# Altium PCB 2016.PcbDoc (part 1 of 6)
Units mm, origin at the board's own origin, x right, y up, seen from the top; angles counter-clockwise.
Board outline 169.8 x 134.24 mm, 2 copper layers (Top Layer, Bottom Layer); 131 components, 191 nets, 797 pads, 168 vias.
Unrouted connection lines stored in the file: 2.
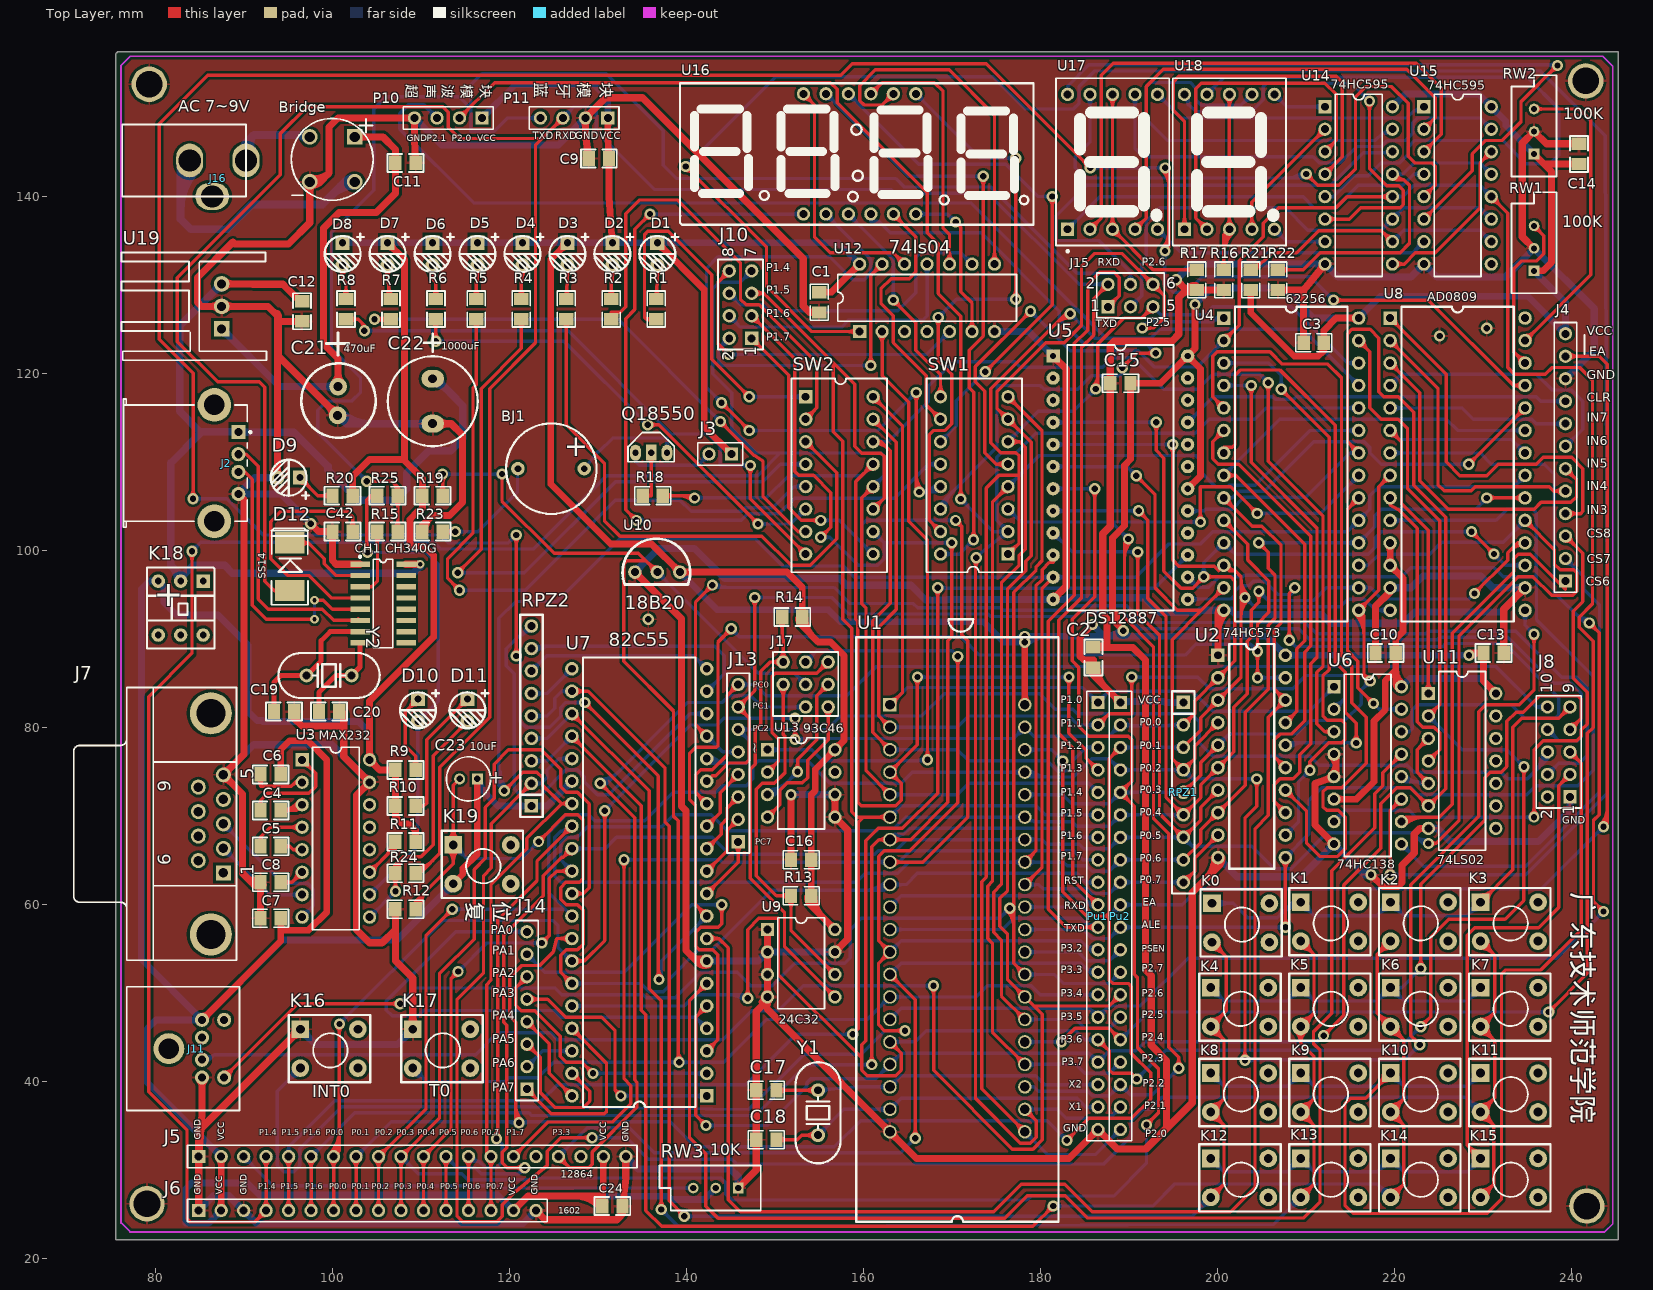
[diagram p0: Top Layer view]
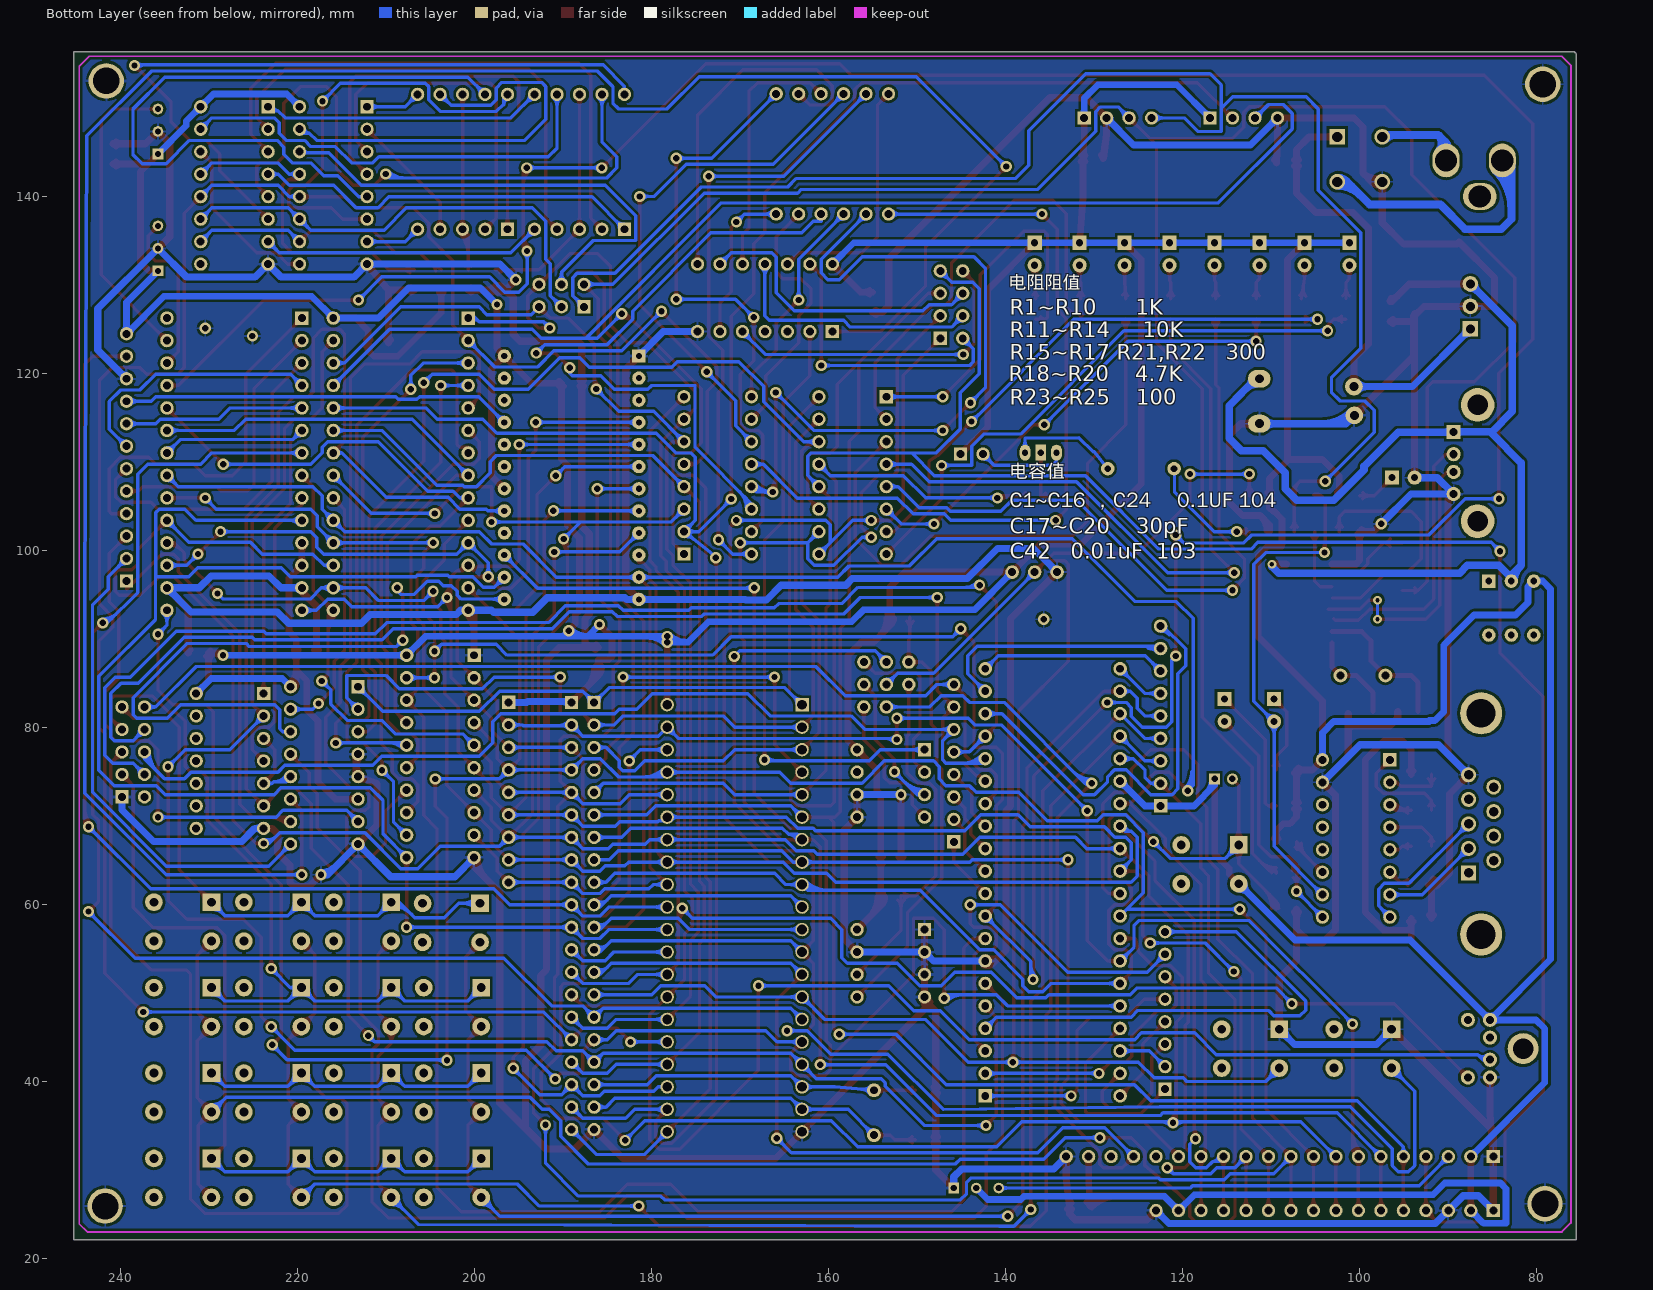
[diagram p1: Bottom Layer view, seen from below]

## Layer stack, top to bottom
Top Layer: signal copper 0.0356
Dielectric: dielectric 0.32, FR-4, Dk 4.8
Bottom Layer: signal copper 0.0356

## Board outline
75.565,156.21 75.692,156.337 245.237,156.337 245.237,22.098 75.438,22.098 75.438,156.083 75.565,156.21

## Design rules (kind name [scope] priority, off if disabled: settings)
Clearance [All] p1: gap=0.305
ComponentClearance [All] p1 off: gap=0.254 collisioncheckmode=3 verticalgap=0.254
Height [All] p1 off: minheight=0 maxheight=25.4 prefheight=12.7
PolygonConnect [All] p1: connectstyle=Relief reliefconductorwidth=0.254 reliefentries=4 polygonreliefangle="90 Angle"
RoutingVias [All] p1 off: holewidth=0.711 width=1.27 viastyle="Through Hole" minholewidth=0.711 minwidth=1.27 maxholewidth=0.711 maxwidth=1.27
SolderMaskExpansion [All] p1: expansion=0.102
TestPointUsage [All] p1: valid=0 allowmultiple=FALSE
Testpoint [All] p1: side=15 testpointundercomponent=TRUE minsize=1.016 maxsize=2.54 preferedsize=1.524 minholesize=0 maxholesize=1.016 preferedholesize=0.813 testpointgrid=0.025 style=1023 order=0123456789
Width Width_2 [InNet('GND')] p1: maxlimit=2.032 minlimit=0.254 preferedwidth=0.813
Width Width_1 [InNet('VCC')] p2: maxlimit=6 minlimit=0.254 preferedwidth=0.762 toplayer_maxwidth=6 bottomlayer_maxwidth=6 minimp=50.000000 maximp=50.000000 favimp=50.000000
Width [All] p3: maxlimit=0.9 minlimit=0.254 preferedwidth=0.381 toplayer_maxwidth=0.9 bottomlayer_maxwidth=0.9 minimp=50.000000 maximp=50.000000 favimp=50.000000
17 further rules are at their usual default settings.

## Components (designator, comment, footprint, x,y, rotation, side; value= is the part's Value field where it differs from the comment)
Bridge "Bridge" E-BIP-P4/D10 100.076,143.764 r270 top
C1 "0.1uF" RAD0.1-1 154.94,128.016 r270 top
C2 "0.1uF" RAD0.1-1 185.928,87.884 r90 top
C3 "0.1uF" RAD0.1-1 210.82,123.444 r180 top
C4 "" RAD0.1-1 92.964,70.612 r180 top
C5 "" RAD0.1-1 92.964,66.548 r180 top
C6 "" RAD0.1-1 92.964,74.676 r0 top
C7 "" RAD0.1-1 92.964,58.42 r0 top
C8 "" RAD0.1-1 92.964,62.484 r0 top
C9 "0.1uF" RAD0.1-1 130.048,144.272 r180 top
C10 "0.1uF" RAD0.1-1 218.948,88.392 r180 top
C11 "104" R1/4 108.204,143.764 r0 top
C12 "0.1uF" R1/4 96.52,127 r270 top
C13 "0.1uF" RAD0.1-1 231.14,88.392 r0 top
C14 "0.1uF" RAD0.1-1 240.792,144.78 r90 top
C15 "0.1uF" RAD0.1-1 188.976,118.872 r180 top
C16 "0.1uF" RAD0.1-1 152.908,65.024 r180 top
C17 "30pF" RAD0.1-1 148.971,38.989 r180 top
C18 "30pF" RAD0.1-1 148.971,33.401 r180 top
C19 "30pF" RAD0.1-1 94.488,81.788 r0 top
C20 "30pF" RAD0.1-1 99.568,81.788 r0 top
C21 "470uF" 470UF 100.584,116.84 r270 top
C22 "1000uF" 1000UF 111.252,116.84 r270 top
C23 "10uF" 10UF 115.316,74.168 r180 top
C24 "104" RAD0.1-1 131.572,25.908 r180 top
C42 "Cap" R1/4 101.092,102.108 r0 top
CH1 "CH340G" CH1 105.664,93.98 r0 top
D1 "LED(GREEN)" LED.1/.16 136.652,133.477 r270 top
D2 "LED(GREEN)" LED.1/.16 131.572,133.477 r270 top
D3 "LED(GREEN)" LED.1/.16 126.492,133.477 r270 top
D4 "LED(GREEN)" LED.1/.16 121.412,133.477 r270 top
D5 "LED(GREEN)" LED.1/.16 116.332,133.477 r270 top
D6 "LED(GREEN)" LED.1/.16 111.252,133.477 r270 top
D7 "LED(GREEN)" LED.1/.16 106.172,133.477 r270 top
D8 "LED(GREEN)" LED.1/.16 101.092,133.477 r270 top
D9 "LED(RED)" LED.1/.16 94.996,108.204 r180 top
D10 "LED(RED)" LED.1/.16 109.601,81.915 r270 top
D11 "LED(GREEN)" LED.1/.16 115.189,81.915 r270 top
D12 "Diode" Q2 94.996,98.044 r90 top
J2 "USB" USB 86.36,109.728 r270 top
J3 "Header 2" HDR1X2 145.034,110.871 r180 top
J4 "USER" HDR1X12 239.268,96.52 r90 top
J5 "12864" HDR1X20 84.836,31.496 r0 top
J6 "1602" HDR1X16 84.836,25.4 r0 top
J7 "DB9" DSUB1.385-2H9 76.708,69.088 r90 top
J8 "Header 5X2" HDR2X5 239.776,72.136 r90 top
J10 "Header 4X2" HDR2X4 147.32,123.952 r90 top
J11 "PS2-6PIN" PS2-6PIN 76.708,43.688 r90 top
J13 "Header 8" HDR1X8 145.796,67.056 r90 top
J14 "Header 8" HDR1X8 121.92,39.116 r90 top
J15 "Header 3X2" HDR2X3 187.579,127.508 r0 top
J16 "DIANYUAN" POWER 86.868,143.764 r0 top
J17 "Component_1" JCT 153.416,84.836 r0 top
K0 "SW-PB" SWITCH 202.565,57.912 r0 top
K1 "SW-PB" SWITCH 212.598,58.039 r0 top
K2 "SW-PB" SWITCH 222.758,58.039 r0 top
K3 "SW-PB" SWITCH 232.918,58.039 r0 top
K4 "SW-PB" SWITCH 202.438,48.387 r0 top
K5 "SW-PB" SWITCH 212.598,48.387 r0 top
K6 "SW-PB" SWITCH 222.758,48.387 r0 top
K7 "SW-PB" SWITCH 232.918,48.387 r0 top
K8 "SW-PB" SWITCH 202.438,38.735 r0 top
K9 "SW-PB" SWITCH 212.598,38.735 r0 top
K10 "SW-PB" SWITCH 222.758,38.735 r0 top
K11 "SW-PB" SWITCH 232.918,38.735 r0 top
K12 "SW-PB" SWITCH 202.438,29.083 r0 top
K13 "SW-PB" SWITCH 212.598,29.083 r0 top
K14 "SW-PB" SWITCH 222.758,29.083 r0 top
K15 "SW-PB" SWITCH 232.918,29.083 r0 top
K16 "KEY" SWITCH 99.568,43.688 r0 top
K17 "KEY" SWITCH 112.268,43.688 r0 top
K18 "KEY" SWITCH2 82.804,93.472 r270 top
K19 "RST按钮" SWITCH 116.84,64.516 r0 top
P10 "Header 4" HDR1X4 116.84,148.844 r180 top
P11 "Header 4" HDR1X4 131.064,148.844 r180 top
Pu1 "Header 20" HDR1X20 186.436,82.804 r270 top
Pu2 "Header 20" HDR1X20 188.976,82.804 r270 top
Q1 "8550" Q1 135.89,111.379 r180 top
R1 "1K" R1/4 136.525,127.254 r90 top
R2 "1K" R1/4 131.445,127.254 r90 top
R3 "1K" R1/4 126.365,127.254 r90 top
R4 "1K" R1/4 121.285,127.254 r90 top
R5 "1K" R1/4 116.205,127.254 r90 top
R6 "1K" R1/4 111.633,127.254 r90 top
R7 "1K" R1/4 106.553,127.254 r90 top
R8 "1K" R1/4 101.473,127.254 r90 top
R9 "1kΩ" R1/4 108.204,75.184 r0 top
R10 "1kΩ" R1/4 108.204,71.12 r0 top
R11 "10kΩ" R1/4 108.204,67.056 r180 top
R12 "10K" R1/4 108.204,59.436 r0 top
R13 "10K" R1/4 152.908,60.96 r0 top
R14 "10K" R1/4 151.892,92.456 r0 top
R15 "300" R1/4 106.172,102.108 r180 top
R16 "300" R1/4 200.66,130.556 r90 top
R17 "300" R1/4 197.612,130.556 r270 top
R18 "4.7kΩ" R1/4 136.144,106.172 r0 top
R19 "4.7k" R1/4 111.252,106.172 r180 top
R20 "4.7kΩ" R1/4 101.092,106.172 r180 top
R21 "510" R1/4 203.708,130.556 r90 top
R22 "510" R1/4 206.756,130.556 r90 top
R23 "100Ω" R1/4 111.252,102.108 r180 top
R24 "100Ω" R1/4 108.204,63.5 r0 top
R25 "100Ω" R1/4 106.172,106.172 r0 top
RPZ1 "10k" SIP09 196.088,72.644 r0 top
RPZ2 "10k" SIP09 122.428,81.28 r180 top
RW1 "56k" VR5 235.712,134.112 r90 top
RW2 "100k" VR5 235.712,147.32 r90 top
RW3 "" VR5 143.256,27.94 r180 top
SW1 "SW DIP-8" DIP-16-KEY 176.276,99.568 r90 top
SW2 "SW DIP-8" DIP-16-KEY 153.416,117.348 r270 top
U1 "8051" DIP40_1 170.561,57.15 r0 top
U2 "DM74LS573N" DIP20 203.708,77.724 r0 top
U3 "MAX232" DIP-16 100.33,67.437 r270 top
U4 "62256" DIP28A 208.28,109.728 r0 top
U5 "DS12887" DIP24 188.976,108.204 r0 top
U6 "74HC138" DIP-16 216.916,75.692 r270 top
U7 "8255" DIP40 134.62,62.484 r180 top
U8 "ADC0809" DIP28A 227.076,109.728 r0 top
U9 "24C32" DIP-8 152.908,53.34 r270 top
U10 "DS18B20" TO-5 136.652,97.536 r180 top
U11 "74LS02" DIP-14 227.584,76.2 r270 top
U12 "SN74LS04N" DIP-14 167.132,128.524 r0 top
U13 "93c46" DIP-8 152.908,73.66 r270 top
U14 "74HC595" DIP-16 215.9,141.224 r270 top
U15 "74HC595" DIP-16 227.076,141.224 r270 top
U16 "共阳数码管" 四位数码管 159.512,144.78 r0 top
U17 "Dpy Blue-CA" 共阴 188.087,143.891 r0 top
U18 "Dpy Blue-CA" 共阴 201.295,143.891 r0 top
U19 "7805" TO220 87.376,127.508 r90 top
Y1 "11.0592MHz" XTAL2 154.813,36.449 r90 top
Y2 "11.0592MHz" XTAL2 99.568,85.852 r180 top

## Footprints (in the part's own frame and the unit in brackets; to place one, negate y for a bottom-side part, rotate by r counter-clockwise, add the part's x,y. Pads: shape width x height; smd on the part's side, far side on the other; paste and mask are expansions set on the pad)
10UF [mm]
  rect 1.25x1.25 hole 0.75: 1(-1,0)
  round 1.25 hole 0.75: 2(1,0)
  silkscreen extent -2.5,-2.5 2.5,2.5
470UF [mm]
  round 2 hole 1: 1(-1.651,0) 2(1.6,-0.051)
  silkscreen extent -7.74,-4.15 4.12,4.25
1000UF [mil]
  oval 80x100 hole 40: 1(-100,1) 2(100,1)
  silkscreen extent -300,-199 200,201
CH1 [mm]
  rect 2.2x0.6 smd: 1(-2.6,4.445) 2(-2.6,3.175) 3(-2.6,1.905) 4(-2.6,0.635) 5(-2.6,-0.635) 6(-2.6,-1.905) 7(-2.6,-3.175) 8(-2.6,-4.445) 9(2.6,-4.445) 10(2.6,-3.175) 11(2.6,-1.905) 12(2.6,-0.635) 13(2.6,0.635) 14(2.6,1.905) 15(2.6,3.175) 16(2.6,4.445)
  silkscreen extent -2.72,-5 1.1,5.42
DIP20 [mil]
  rect 60x60 hole 35.43: 1(-146,410)
  round 60 hole 35.43: 2(-146,310) 3(-146,210) 4(-146,110) 5(-146,10) 6(-146,-90) 7(-146,-190) 8(-146,-290) 9(-146,-390) 10(-146,-490) 11(154,-490) 12(154,-390) 13(154,-290) 14(154,-190) 15(154,-90) 16(154,10) 17(154,110) 18(154,210) 19(154,310) 20(154,410)
  silkscreen extent -96,-540 104,460
DIP24 [mm]
  rect 1.5x1.5 hole 0.7: 1(-7.6,13.75)
  round 1.5 hole 0.7: 2(-7.6,11.25) 3(-7.6,8.75) 4(-7.6,6.25) 5(-7.6,3.75) 6(-7.6,1.25) 7(-7.6,-1.25) 8(-7.6,-3.75) 9(-7.6,-6.25) 10(-7.6,-8.75) 11(-7.6,-11.25) 12(-7.6,-13.75) 13(7.6,-13.75) 14(7.6,-11.25) 15(7.6,-8.75) 16(7.6,-6.25) 17(7.6,-3.75) 18(7.6,-1.25) 19(7.6,1.25) 20(7.6,3.75) 21(7.6,6.25) 22(7.6,8.75) 23(7.6,11.25) 24(7.6,13.75)
  silkscreen extent -6.01,-15 6.02,15
DIP28A [mil]
  rect 60x60 hole 35: 1(-300,650)
  round 60 hole 35: 2(-300,550) 3(-300,450) 4(-300,350) 5(-300,250) 6(-300,150) 7(-300,50) 8(-300,-50) 9(-300,-150) 10(-300,-250) 11(-300,-350) 12(-300,-450) 13(-300,-550) 14(-300,-650) 15(300,-650) 16(300,-550) 17(300,-450) 18(300,-350) 19(300,-250) 20(300,-150) 21(300,-50) 22(300,50) 23(300,150) 24(300,250) 25(300,350) 26(300,450) 27(300,550) 28(300,650)
  silkscreen extent -250,-700 250,700
DIP40 [mil]
  rect 60x60 hole 35.43: 1(-300,950)
  round 60 hole 35.43: 2(-300,850) 3(-300,750) 4(-300,650) 5(-300,550) 6(-300,450) 7(-300,350) 8(-300,250) 9(-300,150) 10(-300,50) 11(-300,-50) 12(-300,-150) 13(-300,-250) 14(-300,-350) 15(-300,-450) 16(-300,-550) 17(-300,-650) 18(-300,-750) 19(-300,-850) 20(-300,-950) 21(300,-950) 22(300,-850) 23(300,-750) 24(300,-650) 25(300,-550) 26(300,-450) 27(300,-350) 28(300,-250) 29(300,-150) 30(300,-50) 31(300,50) 32(300,150) 33(300,250) 34(300,350) 35(300,450) 36(300,550) 37(300,650) 38(300,750) 39(300,850) 40(300,950)
  silkscreen extent -250,-1000 250,1000
DIP40_1 [mil]
  rect 60x60 hole 43.31: 1(-300,1000)
  round 60 hole 43.31: 2(-300,900) 3(-300,800) 4(-300,700) 5(-300,600) 6(-300,500) 7(-300,400) 8(-300,300) 9(-300,200) 10(-300,100) 11(-300,0) 12(-300,-100) 13(-300,-200) 14(-300,-300) 15(-300,-400) 16(-300,-500) 17(-300,-600) 18(-300,-700) 19(-300,-800) 20(-300,-900) 21(300,-900) 22(300,-800) 23(300,-700) 24(300,-600) 25(300,-500) 26(300,-400) 27(300,-300) 28(300,-200) 29(300,-100) 30(300,0) 31(300,100) 32(300,200) 33(300,300) 34(300,400) 35(300,500) 36(300,600) 37(300,700) 38(300,800) 39(300,900) 40(300,1000)
  silkscreen extent -450,-1300 450,1300
DIP-8 [mm]
  rect 1.5x1.5 hole 0.9: 1(-3.81,-3.81)
  round 1.5 hole 0.9: 2(-1.27,-3.81) 3(1.27,-3.81) 4(3.81,-3.81) 5(3.81,3.81) 6(1.27,3.81) 7(-1.27,3.81) 8(-3.81,3.81)
  silkscreen extent -5.15,-2.65 5.15,2.65
DIP-14 [mm]
  rect 1.5x1.5 hole 0.9: 1(-7.62,-3.81)
  round 1.5 hole 0.9: 2(-5.08,-3.81) 3(-2.54,-3.81) 4(0,-3.81) 5(2.54,-3.81) 6(5.08,-3.81) 7(7.62,-3.81) 8(7.62,3.81) 9(5.08,3.81) 10(2.54,3.81) 11(0,3.81) 12(-2.54,3.81) 13(-5.08,3.81) 14(-7.62,3.81)
  silkscreen extent -10.1,-2.65 10.1,2.65
DIP-16 [mm]
  rect 1.5x1.5 hole 0.9: 1(-8.89,-3.81)
  round 1.5 hole 0.9: 2(-6.35,-3.81) 3(-3.81,-3.81) 4(-1.27,-3.81) 5(1.27,-3.81) 6(3.81,-3.81) 7(6.35,-3.81) 8(8.89,-3.81) 9(8.89,3.81) 10(6.35,3.81) 11(3.81,3.81) 12(1.27,3.81) 13(-1.27,3.81) 14(-3.81,3.81) 15(-6.35,3.81) 16(-8.89,3.81)
  silkscreen extent -10.3,-2.65 10.3,2.65
DIP-16-KEY [mm]
  rect 1.5x1.5 hole 0.9: 1(0,0)
  round 1.5 hole 0.9: 2(2.54,0) 3(5.08,0) 4(7.62,0) 5(10.16,0) 6(12.7,0) 7(15.24,0) 8(17.78,0) 9(17.78,7.62) 10(15.24,7.62) 11(12.7,7.62) 12(10.16,7.62) 13(7.62,7.62) 14(5.08,7.62) 15(2.54,7.62) 16(0,7.62)
  silkscreen extent -2.05,-1.59 19.83,9.2
DSUB1.385-2H9 [mm] "Connector; D Subminiature; 9 Position; Right Angle; Pitch 1.385 mm"
  rect 1.69x1.69 hole 1.09: 1(-5.54,-10.92)
  round 1.69 hole 1.09: 2(-2.77,-10.92) 3(0,-10.92) 4(2.77,-10.92) 5(5.54,-10.92) 6(-4.155,-8.08) 7(-1.385,-8.08) 8(1.385,-8.08) 9(4.155,-8.08)
  round 4.76 hole 3.26: 10(-12.495,-9.5) 11(12.495,-9.5)
  silkscreen extent -15.4,-12.4 15.4,6
E-BIP-P4/D10 [mil]
  round 70 hole 45: 1(-116,-106) 3(84,94) 4(84,-106)
  rect 70x70 hole 45: 2(-116,94)
  silkscreen extent -198,-188 166,176
HDR1X2 [mm] "Connector; Header; 2 Position"
  rect 1.5x1.5 hole 0.9: 1(0,0)
  round 1.5 hole 0.9: 2(2.54,0)
  silkscreen extent -1.27,-1.27 3.81,1.27
HDR1X4 [mm] "Connector; Header; 4 Position"
  rect 1.5x1.5 hole 0.9: 1(0,0)
  round 1.5 hole 0.9: 2(2.54,0) 3(5.08,0) 4(7.62,0)
  silkscreen extent -1.27,-1.27 8.89,1.27
HDR1X8 [mm] "Connector; Header; 8 Position"
  rect 1.5x1.5 hole 0.9: 1(0,0)
  round 1.5 hole 0.9: 2(2.54,0) 3(5.08,0) 4(7.62,0) 5(10.16,0) 6(12.7,0) 7(15.24,0) 8(17.78,0)
  silkscreen extent -1.27,-1.27 19.05,1.27
HDR1X12 [mm] "Connector; Header; 12 Position"
  rect 1.5x1.5 hole 0.9: 1(0,0)
  round 1.5 hole 0.9: 2(2.54,0) 3(5.08,0) 4(7.62,0) 5(10.16,0) 6(12.7,0) 7(15.24,0) 8(17.78,0) 9(20.32,0) 10(22.86,0) 11(25.4,0) 12(27.94,0)
  silkscreen extent -1.27,-1.27 29.21,1.27
HDR1X16 [mm] "Connector; Header; 16 Position"
  rect 1.5x1.5 hole 0.9: 1(0,0)
  round 1.5 hole 0.9: 2(2.54,0) 3(5.08,0) 4(7.62,0) 5(10.16,0) 6(12.7,0) 7(15.24,0) 8(17.78,0) 9(20.32,0) 10(22.86,0) 11(25.4,0) 12(27.94,0) 13(30.48,0) 14(33.02,0) 15(35.56,0) 16(38.1,0)
  silkscreen extent -1.27,-1.27 39.37,1.27
HDR1X20 [mm] "Connector; Header; 20 Position"
  rect 1.5x1.5 hole 0.9: 1(0,0)
  round 1.5 hole 0.9: 2(2.54,0) 3(5.08,0) 4(7.62,0) 5(10.16,0) 6(12.7,0) 7(15.24,0) 8(17.78,0) 9(20.32,0) 10(22.86,0) 11(25.4,0) 12(27.94,0) 13(30.48,0) 14(33.02,0) 15(35.56,0) 16(38.1,0) 17(40.64,0) 18(43.18,0) 19(45.72,0) 20(48.26,0)
  silkscreen extent -1.27,-1.27 49.53,1.27
HDR2X3 [mm] "Connector; Header; 3x2 Position"
  rect 1.5x1.5 hole 0.9: 1(0,0)
  round 1.5 hole 0.9: 2(0,2.54) 3(2.54,0) 4(2.54,2.54) 5(5.08,0) 6(5.08,2.54)
  silkscreen extent -1.27,-1.27 6.35,3.81
HDR2X4 [mm] "Connector; Header; 4x2 Position"
  rect 1.5x1.5 hole 0.9: 1(0,0)
  round 1.5 hole 0.9: 2(0,2.54) 3(2.54,0) 4(2.54,2.54) 5(5.08,0) 6(5.08,2.54) 7(7.62,0) 8(7.62,2.54)
  silkscreen extent -1.27,-1.27 8.89,3.81
HDR2X5 [mm] "Connector; Header; 5x2 Position"
  rect 1.5x1.5 hole 0.9: 1(0,0)
  round 1.5 hole 0.9: 2(0,2.54) 3(2.54,0) 4(2.54,2.54) 5(5.08,0) 6(5.08,2.54) 7(7.62,0) 8(7.62,2.54) 9(10.16,0) 10(10.16,2.54)
  silkscreen extent -1.27,-1.27 11.43,3.81
JCT [mil]
  round 60 hole 35: 1(-100,100) 2(-100,0) 3(0,100) 4(0,0) 5(0,-100) 6(100,100) 7(100,0) 8(100,-100)
  silkscreen extent -145,-140 145,145
LED.1/.16 [mm]
  rect 1.6x1.6 hole 0.8: 1(-1.27,0)
  round 1.6 hole 0.8: 2(1.27,0)
  silkscreen extent -2.31,-2.03 2.03,2.39
POWER [mil]
  oval 120x150 hole 98.42: 1(130,11) 2(-120,11)
  oval 150x120 hole 98.42: 3(-20,-149)
  silkscreen extent -420,-149 130,171
PS2-6PIN [mm] "PS2 Socket, 6 Pin, Through Hole"
  round 1.6 hole 0.9: 1(-1.25,-8.5) 2(1.25,-8.5) 3(-3.25,-8.5) 4(3.25,-8.5) 5(-3.25,-11) 6(3.25,-11)
  round 3.5 hole 2.3: S(0,-4.75)
  silkscreen extent -7,-12.75 7,0
Q1 [mm]
  rect 1.2x1.8 hole 0.7: 1(-0.076,0.356)
  oval 1.2x1.8 hole 0.7: 2(1.702,0.356) 3(-1.854,0.356)
  silkscreen extent -2.67,-1.93 2.54,1.37
Q2 [mm]
  rect 2.4x3.3 smd: 1(-2.586,-0.127) 2(2.794,-0.127)
  silkscreen extent -4.19,-2.18 4.44,1.92
R1/4 [mil]
  rect 55x65 smd: 1(-45,0) 2(45,0)
  silkscreen extent -80,-40 80,40
RAD0.1-1 [mil]
  rect 55x65 smd: 1(-45,0) 2(45,0)
  silkscreen extent -80,-40 80,40
SIP09 [mil]
  rect 60x60 hole 35.43: 1(0,400)
  round 60 hole 35.43: 2(0,300) 3(0,200) 4(0,100) 5(0,0) 6(0,-100) 7(0,-200) 8(0,-300) 9(0,-400)
  silkscreen extent -50,-450 50,450
SWITCH [mm]
  rect 2x2 hole 1: 1(-3.25,2.2)
  round 2 hole 1: 2(-3.25,-2.2) 3(3.25,-2.2) 4(3.25,2.2)
  silkscreen extent -4.55,-3.8 4.65,3.8
SWITCH2 [mil]
  rect 60x60 hole 30: 1(-120,100)
  round 60 hole 30: 2(-120,0) 3(-120,-100) 4(120,-100) 5(120,0) 6(120,100)
  silkscreen extent -180,-150 180,150
TO220 [mil]
  rect 70x70 hole 40: 1(-98,-2)
  round 70 hole 40: 2(2,-2) 3(102,-2)
  silkscreen extent -238,-202 242,443
TO-5 [mil]
  round 60 hole 35.43: 1(100,0) 2(0,0) 3(-100,0)
  silkscreen extent -146,-149 155,55
USB [mm]
  rect 1.6x1.6 hole 0.92: 1(-3.627,2.957)
  round 1.6 hole 0.92: 2(-1.127,2.957) 3(0.873,2.957) 4(3.373,2.957)
  round 3.8 hole 2.3: 5(6.443,0.247) 6(-6.697,0.247)
  silkscreen extent -7.38,-10.03 7.12,4.43
VR5 [mm]
  rect 1.2x1.2 hole 0.7: 1(-2.54,0)
  round 1.2 hole 0.7: 2(0,0) 3(2.54,0)
  silkscreen extent -5.08,-2.54 6.35,2.54
XTAL2 [mil]
  round 62 hole 35.43: 1(-100,0) 2(100,0)
  silkscreen extent -225,-100 225,100
共阴 [mm]
  rect 1.5x1.5 hole 0.9: 1(-5.08,-7.62)
  round 1.5 hole 0.9: 2(-2.54,-7.62) 3(0,-7.62) 4(2.54,-7.62) 5(5.08,-7.62) 6(5.08,7.62) 7(2.54,7.62) 8(0,7.62) 9(-2.54,7.62) 10(-5.08,7.62)
  silkscreen extent -6.4,-10.22 6.4,9.45
四位数码管 [mm]
  round 1.499 hole 0.9: 1(-6.35,-6.794) 12(-6.35,6.794)
  round 1.5 hole 0.9: 2(-3.81,-6.794) 3(-1.27,-6.794) 4(1.27,-6.794) 5(3.81,-6.794) 6(6.35,-6.794) 7(6.35,6.794) 8(3.81,6.794) 9(1.27,6.794) 10(-1.27,6.794) 11(-3.81,6.794)
  silkscreen extent -20.29,-8 19.66,8

## Part data
Bridge: library part Bridge1, "Full Wave Diode Bridge"
C1 C2 C3 C9 C10 C13 C14 C15 C16: library part CAP, "Capacitor"
C4 C5 C6 C7 C8 C11 C24: library part Cap, "Capacitor"
C12 C17 C18 C19 C20: library part CAP
C21 C22 C23: library part "Cap Pol1", "Polarized Capacitor (Radial)"
C42: "Capacitor"
D1 D2 D3 D4 D5 D6 D7 D8 D9 D10 D11: library part LED
D12: "Default Diode"
J3: "Header, 2-Pin"
J4: library part CON12, "Connector"
J5: library part "Header 20", "Header, 20-Pin"
J6: library part "Header 16", "Header, 16-Pin"
J8: "Header, 5-Pin, Dual row"
J10: "Header, 4-Pin, Dual row"
J11: "6 Pin Through Hole PS2 Socket (Kycon P/N)"
J13 J14: "Header, 8-Pin"
J15: "Header, 3-Pin, Dual row"
J16: library part "Header 3", "Header, 3-Pin"
K0 K1 K2 K3 K4 K5 K6 K7 K8 K9 K10 K11 K12 K13 K14 K15: "Switch"
K16 K17: library part SW-PB
K18: library part KEY-4
K19: library part SW-PB, "Switch"
P10 P11: "Header, 4-Pin"
Pu1 Pu2: "Header, 20-Pin"
Q1: library part PNP
R1 R2 R3 R4 R5 R6 R7 R8 R12 R15 R16 R17 R21 R22: library part Res2, "Resistor"
R9 R10 R11 R18 R20 R23 R24 R25: library part RES
R13 R14 R19: library part RES2
RPZ1 RPZ2: library part CON9, "Connector"
RW1 RW2: library part POT2, "Potentiometer"
RW3: library part "Res Tap", "Tapped Resistor"
SW1 SW2: "DIP Switch"
U1: "CPU"
U2: "Octal D Latch with 3-State Output"
U3: library part SP232(LOGIC)
U5: library part DS12887A
U6: library part 74ALS138
U8: library part ADC0808
U9: library part yt100.s01_24C16_3
U12: "Hex Inverter"
U14 U15 U16: library part Component_1
U17 U18: "14.2 mm General Purpose Blue 7-Segment Display: CA, RH DP, Gray Surface"
U19: library part A8187SLT, "Low-Dropout, 3.3 V Regulator"
Y1 Y2: library part CRYSTAL

## Free pads (board coordinates)
  round 4 hole 3: 0(78.994,26.162) 1(79.248,152.654) 2(241.554,153.035) 3(241.681,25.908)
  round 1.524 hole 0.762: 0(128.397,109.22) 1(120.904,109.22)

## Via types
v1: diameter 1.27, hole 0.711, Top Layer to Bottom Layer, 165 vias
v2: diameter 1, hole 0.5, Top Layer to Bottom Layer, 3 vias

## Nets (pads, with @x,y where several pads share a name; then routed paths per layer and width w, separated by ;. In a path a pad name is that pad's centre, name@x,y a point inside that pad or via, vN(x,y) a via of type N, cw(c..) or ccw(c..) an arc to the next point about the centre after c; other vN are vias at no path point)
A0: U2.19 U4.10 U7.9 U8.25 | length 515.6
  Top Layer w0.381: v1@83.887,106.131 ccw(c83.128,106.89) 84.201,106.89 ccw(c85.274,106.89) v1@84.515,106.131 ; v1(84.201,105.816) 84.201,120.015 80.391,123.825 80.391,148.209 85.852,153.67 157.378,153.67 158.674,154.965 173.812,154.965 v1(185.572,143.205) ; v1@120.412,88.376 ccw(c119.653,89.135) 120.726,89.135 ccw(c121.799,89.135) v1@121.041,88.376 ; v1@120.412,101.413 cw(c119.653,100.654) 120.726,100.654 cw(c121.799,100.654) v1@121.041,101.413 ; v1(120.726,88.062) v1(120.726,101.727) ; v1@128.448,82.359 cw(c128.448,81.286) 129.207,82.045 cw(c129.965,82.804) v1@128.892,82.804 ; v1(128.448,82.804) 136.754,74.498 136.754,51.613 v1(136.855,51.511) ; v1@136.541,51.826 ccw(c136.027,52.339) 136.754,52.339 ; 136.754,52.83 ccw(c138.174,52.83) v1@137.17,51.826 ; U7.9@141.668,58.674 ccw(c140.289,58.674) 141.264,59.65 ccw(c142.24,60.625) U7.9@142.24,59.245 ; U7.9@142.24,58.674 140.97,59.944 140.97,71.158 140.297,71.831 140.297,77.051 140.97,77.724 143.307,77.724 143.51,77.927 143.51,89.637 v1(145.009,91.135) ; v1@144.564,91.135 cw(c143.491,91.135) 144.25,90.376 cw(c145.009,89.618) v1@145.009,90.691 ; v1@185.128,143.205 ccw(c184.055,143.205) 184.814,143.964 ccw(c185.572,144.723) v1@185.572,143.65 ; v1@193.691,134.122 ccw(c191.89,135.923) 194.437,135.923 ; v1@193.742,142.891 cw(c192.063,141.212) 194.437,141.212 ; v1@193.96,133.852 ccw(c192.809,135.003) 194.437,135.003 ; v1(194.005,133.807) 194.437,134.239 194.437,142.824 v1(194.056,143.205) ; v1@194.011,143.16 cw(c192.983,142.132) 194.437,142.132 ; U4.10@200.66,102.806 cw(c200.66,101.427) 201.636,102.402 cw(c202.611,103.378) U4.10@201.231,103.378 ; U4.10@200.66,103.378 203.37,100.668 203.37,98.903 205.753,96.52 205.753,92.977 204.47,91.694 v1(204.47,85.598) ; v1@204.156,85.912 ccw(c203.397,86.671) 204.47,86.671 ccw(c205.543,86.671) v1@204.784,85.912 ; v1@204.156,88.281 cw(c203.397,87.522) 204.47,87.522 cw(c205.543,87.522) v1@204.784,88.281 ; v1@204.156,88.91 ccw(c203.397,89.668) 204.47,89.668 ccw(c205.543,89.668) v1@204.784,88.91 ; v1(213.055,128.27) 223.749,128.27 233.401,118.618 ; v1@213.37,127.956 cw(c214.128,127.197) 214.128,128.27 cw(c214.128,129.343) v1@213.37,128.584 ; U8.25@234.274,118.233 ccw(c233.401,117.436) 233.401,118.618 ; U8.25@234.274,119.003 cw(c233.401,119.8) 233.401,118.618 ; U8.25@234.696,118.618 233.401,118.618
  Bottom Layer w0.381: v1(84.201,105.816) 88.024,105.816 92.113,101.727 112.141,101.727 113.041,100.827 119.826,100.827 v1(120.726,101.727) ; v1@84.515,105.502 cw(c85.274,104.743) 85.274,105.816 cw(c85.274,106.89) v1@84.515,106.131 ; v1@120.282,101.727 cw(c119.209,101.727) 119.967,100.968 cw(c120.726,100.209) v1@120.726,101.282 ; v1(120.726,88.062) 121.158,87.63 121.158,80.645 121.793,80.01 124.506,80.01 125.743,81.247 125.743,82.233 126.314,82.804 v1(128.448,82.804) ; v1@128.133,82.49 ccw(c127.375,81.731) 127.375,82.804 ccw(c127.375,83.877) v1@128.133,83.118 ; v1@136.541,51.826 ccw(c135.169,53.198) 137.109,53.198 ; v1@136.81,51.556 ccw(c136.089,52.278) 137.109,52.278 ; v1(136.855,51.511) 137.109,51.765 137.109,53.543 U7.9@142.24,58.674 ; U7.9@141.668,58.674 cw(c140.289,58.674) 141.264,57.698 cw(c142.24,56.723) U7.9@142.24,58.102 ; v1@145.009,90.691 cw(c145.009,89.618) 145.767,90.376 cw(c146.526,91.135) v1@145.453,91.135 ; v1(145.009,91.135) 145.898,90.246 170.967,90.246 173.05,88.163 196.278,88.163 197.51,89.395 203.67,89.395 v1(204.47,88.595) ; v1(185.572,143.205) v1(194.056,143.205) ; v1@185.887,142.891 cw(c186.646,142.132) 186.646,143.205 cw(c186.646,144.278) v1@185.887,143.52 ; v1@193.691,133.493 cw(c192.932,132.734) 194.005,132.734 cw(c195.078,132.734) v1@194.32,133.493 ; v1@193.742,142.891 ccw(c192.983,142.132) 192.983,143.205 ccw(c192.983,144.278) v1@193.742,143.52 ; v1(194.005,133.807) 194.005,130.099 194.945,129.159 196.52,129.159 198.247,130.886 210.439,130.886 v1(213.055,128.27) ; v1@204.025,88.595 ccw(c202.952,88.595) 203.711,89.354 ccw(c204.47,90.113) v1@204.47,89.04 ; v1(204.47,85.598) U2.19@207.62,85.598 ; v1@204.784,85.284 cw(c205.543,84.525) 205.543,85.598 cw(c205.543,86.671) v1@204.784,85.912 ; U2.19@207.215,85.194 ccw(c206.24,84.218) 206.24,85.598 ccw(c206.24,86.978) U2.19@207.215,86.002 ; v1@212.611,128.27 ccw(c211.538,128.27) 212.296,129.029 ccw(c213.055,129.788) v1@213.055,128.714
A1: U2.18 U4.9 U7.8 U8.24 | length 234.7
  Top Layer w0.381: U7.8@142.24,56.134 143.611,56.134 ; U7.8@142.646,55.732 cw(c143.611,54.775) 143.611,56.134 ; U7.8@142.646,56.536 ccw(c143.611,57.493) 143.611,56.134 ; U4.9@200.66,105.346 cw(c200.66,103.967) 201.636,104.942 cw(c202.611,105.918) U4.9@201.231,105.918 ; U4.9@200.66,105.918 203.869,102.709 204.971,102.709 207.124,100.556 207.124,91.818 206.35,91.043 206.35,84.328 U2.18@207.62,83.058 205.677,81.115 205.677,70.04 204.191,68.555 204.191,28.016 201.422,25.248 185.801,25.248 182.689,28.359 177.787,28.359 174.676,25.248 146.05,25.248 144.678,26.619 144.678,55.067 143.611,56.134 ; U2.18@207.62,82.486 ccw(c207.62,81.107) 206.644,82.082 ccw(c205.668,83.058) 207.048,83.058 ccw(c205.668,83.058) 206.644,84.034 ccw(c207.62,85.009) U2.18@207.62,83.629 ; v1(228.346,109.728) U8.24@234.696,116.078 ; v1@228.346,110.172 ccw(c228.346,111.246) 229.105,110.487 ccw(c229.864,109.728) v1@228.79,109.728 ; U8.24@234.124,116.078 cw(c232.745,116.078) 233.72,115.102 cw(c234.696,114.127) U8.24@234.696,115.506
  Bottom Layer w0.381: U4.9@200.66,105.918 201.625,105.918 ; U4.9@201.161,105.643 cw(c201.625,105.389) 201.625,105.918 ; U4.9@201.161,106.193 ccw(c201.625,106.447) 201.625,105.918 ; v1@228.032,109.414 ccw(c227.273,108.655) 227.273,109.728 ccw(c227.273,110.801) v1@228.032,110.042 ; v1(228.346,109.728) 218.44,109.728 217.17,110.998 217.17,111.633 216.535,112.268 210.82,112.268 205.219,106.667 202.374,106.667 201.625,105.918
A2: U2.17 U4.8 U8.23 | length 79.3
  Top Layer w0.381: U4.8@200.66,108.458 202.031,108.458 ; U4.8@201.066,108.056 cw(c202.031,107.099) 202.031,108.458 ; U4.8@201.066,108.86 ccw(c202.031,109.817) 202.031,108.458 ; U2.17@207.62,80.518 208.89,81.788 208.89,88.849 209.817,89.776 209.817,100.672 202.031,108.458 ; U2.17@207.62,81.09 ccw(c207.62,82.469) 208.595,81.494 ccw(c209.571,80.518) U2.17@208.191,80.518
  Bottom Layer w0.381: U4.8@200.66,108.458 206.997,114.795 225.819,114.795 227.076,113.538 U8.23@234.696,113.538 ; U4.8@200.66,109.029 ccw(c200.66,110.409) 201.636,109.434 ccw(c202.611,108.458) U4.8@201.231,108.458 ; U8.23@234.292,113.134 ccw(c233.316,112.158) 233.316,113.538 ccw(c233.316,114.918) U8.23@234.292,113.942
A3: U2.16 U4.7 | length 75.6
  Top Layer w0.381: U4.7@200.66,110.998 200.66,111.633 201.612,111.633 201.93,111.95 201.93,119.761 202.54,120.371 207.01,120.371 213.246,114.135 213.246,87.341 214.372,86.215 214.372,81.723 215.621,80.474 v1(215.621,78.232) ; v1@215.306,78.546 ccw(c214.547,79.305) 215.621,79.305 ccw(c216.694,79.305) v1@215.935,78.546
  Bottom Layer w0.381: U2.16@207.62,77.978 207.874,78.232 v1(215.621,78.232) ; U2.16@207.754,77.843 cw(c208.693,76.905) 208.693,78.232 ; U2.16@208.024,77.574 cw(c209.613,75.985) 209.613,78.232 ; U2.16@208.024,78.382 ccw(c208.386,78.745) 208.386,78.232 ; v1@215.306,77.918 ccw(c214.547,77.159) 214.547,78.232 ccw(c214.547,79.305) v1@215.306,78.546
A4: U2.15 U4.6 | length 51.9
  Top Layer w0.381: U4.6@200.088,113.538 cw(c198.709,113.538) 199.684,112.562 cw(c200.66,111.587) U4.6@200.66,112.966 ; U4.6@200.66,113.538 199.39,112.268 199.39,110.363 200.025,109.728 202.339,109.728 210.502,101.565 210.502,89.187 209.803,88.488 209.803,80.759 208.28,79.235 207.01,79.235 206.362,78.588 206.362,76.695 U2.15@207.62,75.438 ; U2.15@207.048,75.438 ccw(c205.668,75.438) 206.644,76.414 ccw(c207.62,77.389) U2.15@207.62,76.01
A5: U2.14 U4.5 | length 98.2
  Top Layer w0.381: U4.5@200.088,116.078 ccw(c198.709,116.078) 199.684,117.054 ccw(c200.66,118.029) U4.5@200.66,116.649 ; U4.5@200.66,116.078 199.403,117.335 199.403,121.92 199.898,122.415 205.88,122.415 207.251,121.044 212.395,121.044 213.957,119.482 213.957,88.067 215.124,86.9 215.124,82.75 216.751,81.123 216.751,75.933 213.995,73.177 212.33,73.177 211.861,72.707 211.861,71.038 212.287,70.612 213.614,70.612 214.376,69.85 214.376,66.269 213.512,65.405 211.48,65.405 210.007,66.878 210.007,70.51 U2.14@207.62,72.898 ; U2.14@207.62,72.326 cw(c207.62,70.947) 208.595,71.922 cw(c209.571,72.898) U2.14@208.191,72.898
A6: U2.13 U4.4 | length 65.5
  Top Layer w0.381: v1@203.444,118.304 cw(c202.686,117.545) 203.759,117.545 cw(c204.832,117.545) v1@204.073,118.304 ; v1(203.759,118.618) 203.759,109.939 211.188,102.509 211.188,87.898 210.489,87.199 210.489,78.143 209.244,76.898 209.244,74.93 208.482,74.168 207.01,74.168 206.362,73.52 206.362,71.615 U2.13@207.62,70.358 ; U2.13@207.048,70.358 ccw(c205.668,70.358) 206.644,71.334 ccw(c207.62,72.309) U2.13@207.62,70.929
  Bottom Layer w0.381: U4.4@200.66,118.618 v1(203.759,118.618) ; U4.4@201.064,118.214 cw(c202.04,117.238) 202.04,118.618 cw(c202.04,119.998) U4.4@201.064,119.022 ; v1@203.444,118.304 ccw(c202.686,117.545) 202.686,118.618 ccw(c202.686,119.691) v1@203.444,118.932
A7: U2.12 U4.3 | length 78
  Top Layer w0.381: v1@207.137,117.742 cw(c207.137,116.669) 207.896,117.427 cw(c208.655,118.186) v1@207.582,118.186 ; v1(207.137,118.186) 212.56,112.763 212.56,86.526 211.861,85.827 211.861,81.28 212.344,80.797 213.995,80.797 214.351,80.44 214.351,78.588 213.995,78.232 212.522,78.232 210.388,76.098 ; v1@210.099,75.471 ccw(c209.563,76.098) 210.388,76.098 ; v1(210.388,75.133) 210.388,76.098 ; v1@210.677,75.471 cw(c211.214,76.098) 210.388,76.098
  Bottom Layer w0.381: U4.3@200.66,121.158 205.74,121.158 207.137,119.761 v1(207.137,118.186) ; U4.3@201.064,120.754 cw(c202.04,119.778) 202.04,121.158 cw(c202.04,122.538) U4.3@201.064,121.562 ; v1@206.823,118.501 ccw(c206.064,119.259) 207.137,119.259 ccw(c208.21,119.259) v1@207.451,118.501 ; U2.12@207.62,67.818 209.093,69.291 209.093,73.838 v1(210.388,75.133) ; U2.12@207.62,68.389 ccw(c207.62,69.769) 208.595,68.794 ccw(c209.571,67.818) U2.12@208.191,67.818 ; v1@209.944,75.133 cw(c208.871,75.133) 209.629,74.374 cw(c210.388,73.616) v1@210.388,74.689
ALE: Pu2.11 U1.30 U2.11 U5.14 U8.10 | length 188.7
  Top Layer w0.381: U2.11@207.215,64.874 cw(c206.24,63.898) 207.62,63.898 cw(c208.999,63.898) U2.11@208.024,64.874 ; v1@207.305,57.718 ccw(c206.546,58.477) 207.62,58.477 ccw(c208.693,58.477) v1@207.934,57.718 ; v1(207.62,57.404) U2.11@207.62,65.278
  Bottom Layer w0.381: U1.30@178.181,57.15 184.76,57.15 185.776,56.134 187.706,56.134 Pu2.11@188.976,57.404 v1(207.62,57.404) ; U1.30@178.585,56.746 cw(c179.561,55.77) 179.561,57.15 cw(c179.561,58.53) U1.30@178.585,57.554 ; Pu2.11@188.417,57.404 cw(c187.066,57.404) 188.021,56.449 cw(c188.976,55.494) Pu2.11@188.976,56.845 ; Pu2.11@189.372,57.008 cw(c190.327,56.053) 190.327,57.404 cw(c190.327,58.755) Pu2.11@189.372,57.8 ; U5.14@196.576,96.395 cw(c196.576,95.044) 197.531,95.999 cw(c198.486,96.954) U5.14@197.136,96.954 ; U5.14@196.576,96.954 197.696,95.834 198.958,95.834 200.152,97.028 202.806,97.028 202.971,97.193 206.439,97.193 206.604,97.028 220.777,97.028 221.767,98.019 231.242,98.019 232.232,97.028 235.991,97.028 ; v1@207.305,57.09 ccw(c206.546,56.331) 206.546,57.404 ccw(c206.546,58.477) v1@207.305,57.718 ; U2.11@207.62,65.278 210.287,67.945 210.287,71.73 211.709,73.152 221.818,73.152 222.58,72.39 234.899,72.39 235.915,73.406 240.665,73.406 242.418,75.159 242.418,85.75 235.991,92.177 235.991,97.028 ; U2.11@207.62,65.849 ccw(c207.62,67.229) 208.595,66.254 ccw(c209.571,65.278) U2.11@208.191,65.278 ; U8.10@219.456,103.378 231.419,103.378 232.689,104.648 235.585,104.648 235.966,104.267 235.966,97.409 235.991,97.028 ; U8.10@219.86,102.974 cw(c220.836,101.998) 220.836,103.378 cw(c220.836,104.758) U8.10@219.86,103.782
CLKRST: J4.9 U5.21 | length 48.6
  Bottom Layer w0.381: U5.21@196.576,114.454 199.47,117.348 206.146,117.348 206.451,117.043 208.559,117.043 208.864,117.348 235.966,117.348 236.474,116.84 J4.9@239.268,116.84 ; U5.21@196.576,115.014 ccw(c196.576,116.364) 197.531,115.409 ccw(c198.486,114.454) U5.21@197.136,114.454 ; J4.9@238.872,116.444 ccw(c237.917,115.489) 237.917,116.84 ccw(c237.917,118.191) J4.9@238.872,117.236
CS1: U4.20 U6.15 | length 34.4
  Top Layer w0.381: U4.20@215.328,105.918 cw(c213.949,105.918) 214.924,104.942 cw(c215.9,103.967) U4.20@215.9,105.346 ; U4.20@215.9,105.918 214.643,104.661 214.643,88.639 215.81,87.472 215.81,84.444 v1(217.576,82.677) ; v1@217.132,82.677 ccw(c216.059,82.677) 216.818,83.436 ccw(c217.576,84.195) v1@217.576,83.121
  Bottom Layer w0.381: v1(217.576,82.677) 218.211,82.042 U6.15@220.726,82.042 ; U6.15@220.33,81.646 ccw(c219.375,80.691) 219.375,82.042 ccw(c219.375,83.393) U6.15@220.33,82.438
CS2: U5.13 U6.14 | length 82.3
  Top Layer w0.381: v1@207.737,90.154 ccw(c206.978,90.913) 208.051,90.913 ccw(c209.125,90.913) v1@208.366,90.154 ; v1(208.051,89.84) 208.051,95.123 v1(208.686,95.758)
  Bottom Layer w0.381: U5.13@196.576,94.454 196.61,94.488 201.473,94.488 201.917,94.932 201.917,95.352 202.565,95.999 203.492,95.999 204,96.507 205.26,96.507 206.758,95.009 208.28,95.009 208.686,95.415 v1(208.686,95.758) ; U5.13@196.972,94.058 cw(c198.009,93.021) 198.009,94.488 ; U5.13@196.972,94.85 ccw(c197.845,95.723) 197.845,94.488 ; v1(208.051,89.84) 208.768,89.123 ; v1@208.07,89.396 cw(c208.109,88.464) 208.768,89.123 ; v1@208.496,89.821 ccw(c209.427,89.783) 208.768,89.123 ; U6.14@220.726,79.502 221.615,79.502 221.971,79.858 221.971,81.991 222.529,82.55 233.121,82.55 234.645,81.026 238.125,81.026 238.506,81.407 238.506,83.363 232.395,89.474 225.745,89.474 225.394,89.123 208.768,89.123
CS3: U6.13 U7.6 | length 158.8
  Top Layer w0.381: U7.6@141.668,51.054 cw(c140.289,51.054) 141.264,50.078 cw(c142.24,49.103) U7.6@142.24,50.482 ; U7.6@142.24,51.054 140.284,49.098 140.284,33.68 142.138,31.826 142.138,25.883 143.51,24.511 175.92,24.511 178.46,27.051 182.753,27.051 185.242,24.562 209.702,24.562 211.531,26.391 211.531,43.51 210.795,44.247 210.795,45.618 212.877,47.701 212.877,63.8 217.703,68.626 217.703,72.492 218.627,73.416 218.627,74.863 U6.13@220.726,76.962 ; U6.13@220.167,76.962 cw(c218.816,76.962) 219.771,76.007 cw(c220.726,75.052) U6.13@220.726,76.403
CS4: U6.12 U11.3 U11.5 | length 19
  Top Layer w0.381: U11.5@223.215,73.66 ccw(c221.864,73.66) 222.819,74.615 ccw(c223.774,75.57) U11.5@223.774,74.219 ; U11.3@223.215,78.74 cw(c221.864,78.74) 222.819,77.785 cw(c223.774,76.83) U11.3@223.774,78.181 ; U11.5@223.774,73.66 222.504,74.93 222.504,77.47 U11.3@223.774,78.74
  Bottom Layer w0.381: U6.12@220.547,74.327 ccw(c221.362,74.761) 221.362,73.838 ; U6.12@220.726,74.422 221.31,73.838 222.631,73.838 ; U6.12@220.884,74.506 ccw(c221.996,75.099) 221.996,73.838 ; U6.12@221.22,74.685 ccw(c222.631,75.437) 222.631,73.838 ; U11.5@223.288,73.382 ccw(c222.809,73.107) 222.809,73.66 ; U11.5@223.288,73.938 cw(c222.809,74.213) 222.809,73.66 ; U11.5@223.774,73.66 222.809,73.66 ; 222.631,73.838 222.809,73.66
CS5: U6.11 U12.1 | length 268.1
  Top Layer w0.381: v1@139.878,142.913 cw(c139.878,141.84) 140.637,142.599 cw(c141.395,143.358) v1@140.322,143.358 ; v1(139.878,143.358) 148.996,134.239 148.996,129.819 154.102,124.714 U12.1@159.512,124.714 ; U12.1@159.116,124.318 ccw(c158.161,123.363) 158.161,124.714 ccw(c158.161,126.065) U12.1@159.116,125.11 ; v1@219.142,63.662 ccw(c218.383,64.421) 219.456,64.421 ccw(c220.529,64.421) v1@219.77,63.662 ; v1(219.456,63.348) 219.456,70.612 U6.11@220.726,71.882 ; U6.11@220.167,71.882 cw(c218.816,71.882) 219.771,70.927 cw(c220.726,69.972) U6.11@220.726,71.323
  Bottom Layer w0.381: v1(139.878,143.358) 150.012,153.492 174.574,153.492 178.207,149.859 183.666,149.859 184.302,150.495 184.302,152.4 186.054,154.153 236.423,154.153 243.738,146.837 243.971,94.433 243.971,72.541 234.778,63.348 v1(219.456,63.348) ; v1@139.878,143.802 ccw(c139.878,144.875) 140.637,144.116 ccw(c141.395,143.358) v1@140.322,143.358 ; v1@219.77,63.033 cw(c220.529,62.274) 220.529,63.348 cw(c220.529,64.421) v1@219.77,63.662
CS6: J4.1 U6.10 | length 50.9
  Top Layer w0.381: U6.10@220.583,69.485 cw(c221.464,68.604) 221.464,69.85 ; U6.10@220.726,69.342 221.234,69.85 225.019,69.85 226.466,71.298 226.466,90.627 233.439,97.599 233.439,99.06 233.934,99.555 235.305,99.555 238.804,96.056 239.268,95.593 J4.1@239.268,96.52 ; U6.10@220.852,69.216 cw(c222.383,67.685) 222.383,69.85 ; U6.10@221.122,68.946 cw(c223.303,66.765) 223.303,69.85
CS7: J4.2 U6.9 | length 59.1
  Bottom Layer w0.381: U6.9@220.726,66.243 cw(c220.726,64.892) 221.681,65.847 cw(c222.636,66.802) U6.9@221.285,66.802 ; U6.9@220.726,66.802 223.215,64.313 234.773,64.313 243.103,72.643 243.103,93.828 241.325,95.606 241.325,97.003 J4.2@239.268,99.06 ; J4.2@239.268,98.501 cw(c239.268,97.15) 240.223,98.105 cw(c241.178,99.06) J4.2@239.827,99.06
CS8: J4.3 U6.7 | length 69.5
  Top Layer w0.381: v1@235.398,70.164 ccw(c234.639,70.923) 235.712,70.923 ccw(c236.785,70.923) v1@236.026,70.164 ; v1(235.712,69.85) 235.712,77.47 236.728,78.486 240.563,78.486 241.046,78.969 241.046,79.704 241.707,80.365 241.707,83.943 240.132,85.519 240.132,93.116 241.224,94.209 241.224,99.644 J4.3@239.268,101.6 ; J4.3@239.268,101.041 cw(c239.268,99.69) 240.223,100.645 cw(c241.178,101.6) J4.3@239.827,101.6
  Bottom Layer w0.381: U6.7@213.106,69.342 214.376,70.612 221.59,70.612 222.352,69.85 v1(235.712,69.85) ; U6.7@213.106,69.901 ccw(c213.106,71.252) 214.061,70.297 ccw(c215.016,69.342) U6.7@213.665,69.342 ; v1@235.398,69.536 ccw(c234.639,68.777) 234.639,69.85 ccw(c234.639,70.923) v1@235.398,70.164
D+: CH1.6 J2.2 | length 30.2
  Top Layer w0.381: J2.2@89.317,110.855 90.186,110.855 91.567,109.474 91.567,94.488 92.71,93.345 98.806,93.345 100.076,92.075 102.676,92.075 CH1.6@102.87,92.269
D-: CH1.5 J2.3 | length 32
  Top Layer w0.381: J2.3@89.317,108.855 90.027,108.855 90.881,108.001 90.881,93.777 92.456,92.202 v2(97.917,92.202) ; v2(97.917,94.361) 98.933,94.361 99.949,93.345 CH1.5@103.505,93.345
  Bottom Layer w0.381: v2(97.917,92.202) v2(97.917,94.361)
EA: J4.11 Pu2.10 U1.31 | length 140.9
  Top Layer w0.381: J4.11@239.268,121.92 243.078,121.92 243.975,121.023 243.975,69.172 v1(243.561,68.758) ; J4.11@239.664,121.524 cw(c240.619,120.569) 240.619,121.92 cw(c240.619,123.271) J4.11@239.664,122.316 ; v1@243.246,69.072 ccw(c241.488,70.831) 243.975,70.831 ; v1@243.516,68.803 ccw(c242.408,69.911) 243.975,69.911
  Bottom Layer w0.381: U1.31@178.181,59.69 184.76,59.69 185.776,58.674 187.706,58.674 Pu2.10@188.976,59.944 195.961,59.944 197.764,61.747 236.55,61.747 v1(243.561,68.758) ; U1.31@178.585,59.286 cw(c179.561,58.31) 179.561,59.69 cw(c179.561,61.07) U1.31@178.585,60.094 ; Pu2.10@188.417,59.944 cw(c187.066,59.944) 188.021,58.989 cw(c188.976,58.034) Pu2.10@188.976,59.385 ; Pu2.10@189.372,59.548 cw(c190.327,58.593) 190.327,59.944 cw(c190.327,61.295) Pu2.10@189.372,60.34 ; v1@243.116,68.758 cw(c242.043,68.758) 242.802,67.999 cw(c243.561,67.24) v1@243.561,68.313